# Altium PCB PCB3.PcbDoc
Units mil, origin at the board's own origin, x right, y up, seen from the top; angles counter-clockwise.
Board outline 6000 x 4000 mil, 2 copper layers (Top Layer, Bottom Layer); 68 components, 131 nets, 210 pads, 0 vias.
Unrouted connection lines stored in the file: 108.
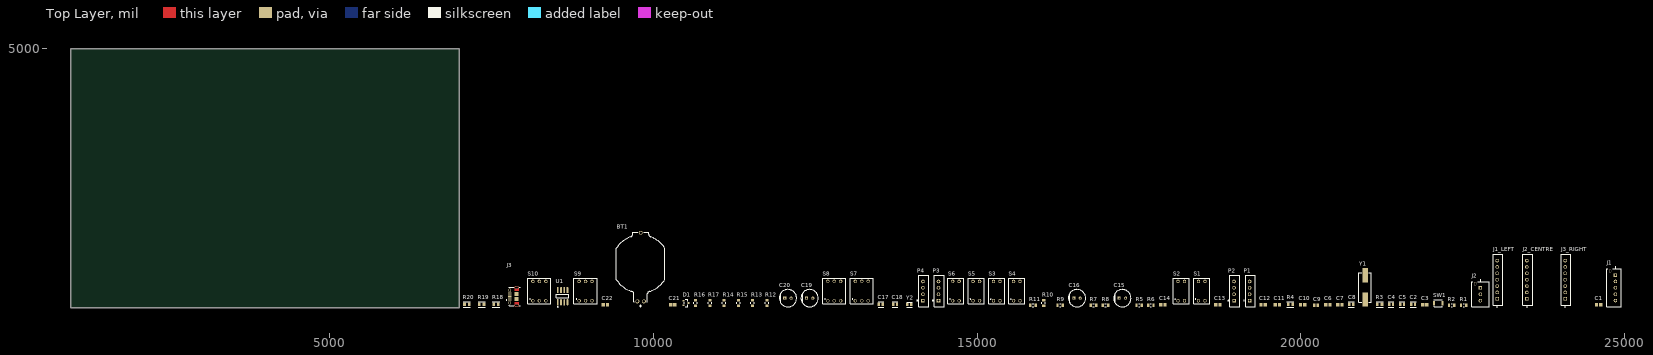
[diagram p0: Top Layer view]
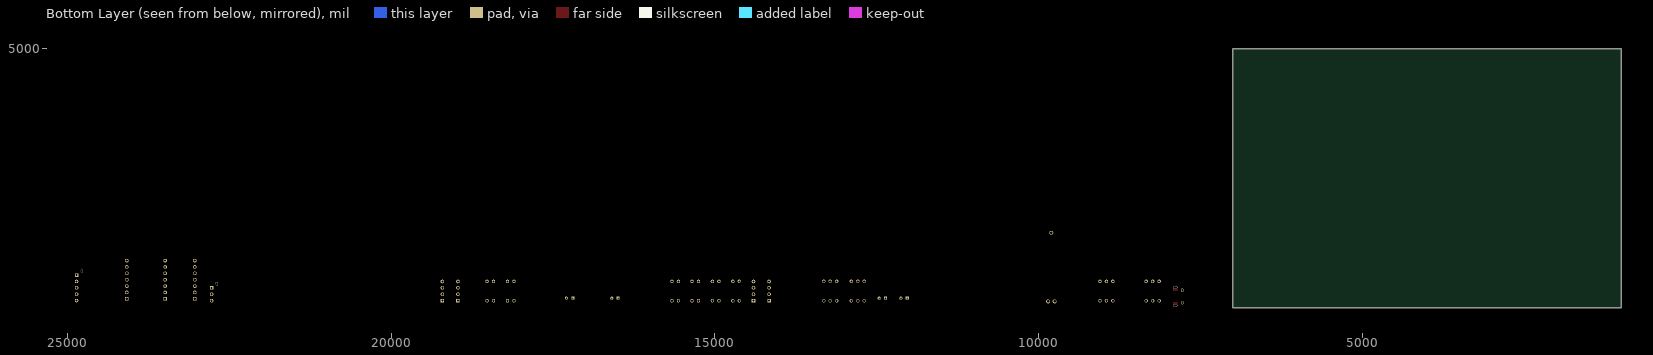
[diagram p1: Bottom Layer view, seen from below]

## Layer stack, top to bottom
Top Solder: solder mask 0.4, Solder Resist, Dk 3.5
Top Layer: signal copper 1.4
Dielectric 1: dielectric 12.6, FR-4, Dk 4.8
Bottom Layer: signal copper 1.4
Bottom Solder: solder mask 0.4, Solder Resist, Dk 3.5

## Board outline
1000,1000 7000,1000 7000,5000 1000,5000

## Design rules (kind name [scope] priority, off if disabled: settings)
Clearance [All] p1: gap=10 ignorepadtopadclearanceinfootprint=FALSE
PolygonConnect [All] p1: connectstyle=Relief reliefconductorwidth=10 reliefentries=4 polygonreliefangle="90 Angle" airgapwidth=10
RoutingVias [All] p1: holewidth=28 width=50 viastyle="Through Hole" minholewidth=28 minwidth=50 maxholewidth=28 maxwidth=50
SolderMaskExpansion [All] p1: expansion=0 istentingtop=FALSE
SupplyNets "Schematic Supply Nets_3" [InNet('VDD')] p1: voltage=0.000
SupplyNets "Schematic Supply Nets_2" [InNet('GND')] p2: voltage=0.000
SupplyNets "Schematic Supply Nets_1" [InNet('+5')] p3: voltage=0.000
SupplyNets "Schematic Supply Nets" [InNet('+12')] p4: voltage=0.000
Width [All] p1: maxlimit=10 minlimit=10 preferedwidth=10
30 further rules are at their usual default settings.

## Components (designator, comment, footprint, x,y, rotation, side; value= is the part's Value field where it differs from the comment)
BT1 "120591-1" TECO-120591-1-2_V 9805,1625 r90 top
C1 "VJ0805Y104MXAAT" CAPC2013X145X48NL20T23 24600,1045 r0 top
C2 "C0805C225K4RACAUTO" FP-C0805C225K4RACAUTO-MFG 21735,1050 r0 top
C3 "VJ0805Y104MXAAT" CAPC2013X145X48NL20T23 21915,1045 r0 top
C4 "C0805C200J5GACAUTO" FP-C0805C-DN-MFG 21395,1050 r0 top value="20 pF"
C5 "C0805C200J5GACAUTO" FP-C0805C-DN-MFG 21565,1050 r0 top value="20 pF"
C6 "VJ0805Y104MXAAT" CAPC2013X145X48NL20T23 20420,1045 r0 top
C7 "VJ0805Y104MXAAT" CAPC2013X145X48NL20T23 20605,1045 r0 top
C8 "C0805C225K4RACAUTO" FP-C0805C225K4RACAUTO-MFG 20780,1050 r0 top
C9 "C0805C106K8RACTU" CAPC2013X145X50LL20T25 20235,1035 r0 top
C10 "VJ0805Y104MXAAT" CAPC2013X145X48NL20T23 20030,1045 r0 top
C11 "VJ0805Y104MXAAT" CAPC2013X145X48NL20T23 19640,1045 r0 top
C12 "VJ0805Y104MXAAT" CAPC2013X145X48NL20T23 19420,1045 r0 top
C13 "VJ0805Y104MXAAT" CAPC2013X145X48NL20T23 18720,1045 r0 top
C14 "VJ0805Y104MXAAT" CAPC2013X145X48NL20T23 17870,1045 r0 top
C15 "EEUFM1E101B" FP-RAD-TH-D_6_3_0_5-L_11-MFG 17245,1145 r0 top
C16 "EEUFM1E101B" FP-RAD-TH-D_6_3_0_5-L_11-MFG 16545,1145 r0 top
C17 "C0805C120JAGACTU" FP-C0805C-DN-MFG 13515,1050 r0 top value="12 pF"
C18 "C0805C120JAGACTU" FP-C0805C-DN-MFG 13735,1050 r0 top value="12 pF"
C19 "EEUFM1E101B" FP-RAD-TH-D_6_3_0_5-L_11-MFG 12415,1145 r0 top
C20 "EEUFM1E101B" FP-RAD-TH-D_6_3_0_5-L_11-MFG 12080,1145 r0 top
C21 "VJ0805Y104MXAAT" CAPC2013X145X48NL20T23 10300,1045 r0 top
C22 "VJ0805Y104MXAAT" CAPC2013X145X48NL20T23 9260,1045 r0 top
D1 "BAT54C,215" FP-SOT23-MFG 10505,1070 r0 top value=10pF
J1 "B5B-XH-AM(LF)(SN)" FP-B5B-XH-AM_LF_SN-MFG 24840,1305 r90 top
J1_LEFT "B7B-EH-A(LF)(SN)" FP-B7B-EH-A_LF_SN-MFG 23045,1430 r90 top
J2 "BH3B-XH-2(LF)(SN)" FP-BH3B-XH-2_LF_SN-MFG 22775,1205 r90 top
J2_CENTRE "B7B-EH-A(LF)(SN)" FP-B7B-EH-A_LF_SN-MFG 23505,1430 r90 top
J3 "10118194-0001LF" AMPHENOL_10118194-0001LF 7890,1170 r90 top
J3_RIGHT "B7B-EH-A(LF)(SN)" FP-B7B-EH-A_LF_SN-MFG 24095,1430 r90 top
P1 "B4B-EH-A(LF)(SN)" JST-B4B-EH-A_V 19210,1255 r90 top
P2 "B4B-EH-A(LF)(SN)" JST-B4B-EH-A_V 18970,1255 r90 top
P3 "B4B-EH-A(LF)(SN)" JST-B4B-EH-A_V 14405,1255 r90 top
P4 "B4B-EH-A(LF)(SN)" JST-B4B-EH-A_V 14165,1255 r90 top
R1 "AT0805DRE0710KL" FP-AT0805-MFG 22515,1035 r0 top
R2 "AT0805DRE0710KL" FP-AT0805-MFG 22330,1035 r0 top
R3 "AF0805JR-070RL" FP-AF0805-IPC_B 21220,1050 r0 top
R4 "AF0805JR-070RL" FP-AF0805-IPC_B 19840,1050 r0 top
R5 "AT0805DRE0710KL" FP-AT0805-MFG 17505,1035 r0 top
R6 "AT0805DRE0710KL" FP-AT0805-MFG 17685,1035 r0 top
R7 "AT0805DRE0710KL" FP-AT0805-MFG 16800,1035 r0 top
R8 "AT0805DRE0710KL" FP-AT0805-MFG 16985,1035 r0 top
R9 "AT0805DRE0710KL" FP-AT0805-MFG 16285,1035 r0 top
R10 "RMCF0805JG4K70" FP-RMCF0805-MFG 16030,1070 r90 top
R11 "RMCF0805JG4K70" FP-RMCF0805-MFG 15865,1035 r0 top
R12 "AT0805DRE0710KL" FP-AT0805-MFG 11755,1070 r90 top
R13 "AT0805DRE0710KL" FP-AT0805-MFG 11535,1070 r90 top
R14 "AT0805DRE0710KL" FP-AT0805-MFG 11095,1070 r90 top
R15 "AT0805DRE0710KL" FP-AT0805-MFG 11315,1070 r90 top
R16 "AT0805DRE0710KL" FP-AT0805-MFG 10655,1070 r90 top
R17 "AT0805DRE0710KL" FP-AT0805-MFG 10875,1070 r90 top
R18 "AF0805JR-070RL" FP-AF0805-IPC_B 7570,1050 r0 top
R19 "AF0805JR-070RL" FP-AF0805-IPC_B 7350,1050 r0 top
R20 "AF0805JR-070RL" FP-AF0805-IPC_B 7120,1050 r0 top
S1 "418117270902" 418117270902 18470,1255 r0 top
S2 "418117270902" 418117270902 18155,1255 r0 top
S3 "418117270902" 418117270902 15305,1255 r0 top
S4 "418117270902" 418117270902 15615,1255 r0 top
S5 "418117270902" 418117270902 14990,1255 r0 top
S6 "418117270902" 418117270902 14675,1255 r0 top
S7 "418117270903" 418117270903 13220,1255 r0 top
S8 "418117270903" 418117270903 12795,1255 r0 top
S9 "418117270903" 418117270903 8955,1255 r0 top
S10 "418117270903" 418117270903 8240,1255 r0 top
SW1 "B3U-1000P" FP-B3U-1000P-MFG 22125,1065 r0 top
U1 "W25Q16JVSNIQ TR" FP-W25Q16JVSNIQ_TR-IPC_A 8600,1175 r90 top
Y1 "ABLS-8.000MHZ-B2-T" FP-ABLS-MFG 20995,1310 r90 top
Y2 "NX2012SA-32.768K-STD-MUB-1" FP-NX2012SA-MFG 13955,1045 r0 top

## Footprints (in the part's own frame and the unit in brackets; to place one, negate y for a bottom-side part, rotate by r counter-clockwise, add the part's x,y. Pads: shape width x height; smd on the part's side, far side on the other; paste and mask are expansions set on the pad)
418117270902 [mm]
  round 1.308 hole 0.8: 1(-1.27,-3.81) 2(1.27,-3.81) A1(-1.27,3.81) A2(1.27,3.81)
  silkscreen extent -3.14,-5.05 3.14,5.05, body extent -3.04,-6.45 3.04,4.1, height 4.95
418117270903 [mm]
  round 1.308 hole 0.8: 1(-2.54,-3.81) 2(0,-3.81) 3(2.54,-3.81) A1(-2.54,3.81) A2(0,3.81) A3(2.54,3.81)
  silkscreen extent -4.56,-5.05 4.56,5.05, body extent -4.46,-6.45 4.46,4.1, height 4.95
AMPHENOL_10118194-0001LF [mm]
  rect 0.4x1.35 smd: 1(-1.3,2.675) 2(-0.65,2.675) 3(0,2.675) 4(0.65,2.675) 5(1.3,2.675)
  oval 0.775x1.55 hole 0.5 slot 1.15 at 90 deg mask+0: SH1(-3.5,0) SH4(3.5,0)
  rect 1.5x1.55 smd: SH2(1,0) SH3(-1,0)
  oval 1.3x0.95 hole 0.55 slot 0.9 at 0 deg: SH5(-2.5,2.7) SH6(2.5,2.7)
  Top Layer region: 3.471,0.774 3.497,0.772 3.523,0.769 3.549,0.764 3.574,0.758 3.6,0.751 3.624,0.742 3.648,0.732 3.672,0.721 3.695,0.708 3.717,0.694 3.739,0.68 3.76,0.664 3.78,0.647 3.799,0.629 3.817,0.61 3.834,0.59 3.85,0.569 3.864,0.547 3.878,0.525 3.891,0.502 3.902,0.478 3.912,0.454 3.921,0.43 3.928,0.404 3.934,0.379 3.939,0.353 3.942,0.327 3.944,0.301 3.945,0.275 3.945,-0.275 3.944,-0.301 3.942,-0.327 3.939,-0.353 3.934,-0.379 3.928,-0.404 3.921,-0.43 3.912,-0.454 3.902,-0.478 3.891,-0.502 3.878,-0.525 3.864,-0.547 3.85,-0.569 3.834,-0.59 3.817,-0.61 3.799,-0.629 3.78,-0.647 3.76,-0.664 3.739,-0.68 3.717,-0.694 3.695,-0.708 3.672,-0.721 3.648,-0.732 3.624,-0.742 3.6,-0.751 3.574,-0.758 3.549,-0.764 3.523,-0.769 3.497,-0.772 3.471,-0.774 3.445,-0.775 2.3,-0.775 2.3,0.775 3.445,0.775
  Top Layer region: -2.3,-0.775 -3.445,-0.775 -3.471,-0.774 -3.497,-0.772 -3.523,-0.769 -3.549,-0.764 -3.574,-0.758 -3.6,-0.751 -3.624,-0.742 -3.648,-0.732 -3.672,-0.721 -3.695,-0.708 -3.717,-0.694 -3.739,-0.68 -3.76,-0.664 -3.78,-0.647 -3.799,-0.629 -3.817,-0.61 -3.834,-0.59 -3.85,-0.569 -3.864,-0.547 -3.878,-0.525 -3.891,-0.502 -3.902,-0.478 -3.912,-0.454 -3.921,-0.43 -3.928,-0.404 -3.934,-0.379 -3.939,-0.353 -3.942,-0.327 -3.944,-0.301 -3.945,-0.275 -3.945,0.275 -3.944,0.301 -3.942,0.327 -3.939,0.353 -3.934,0.379 -3.928,0.404 -3.921,0.43 -3.912,0.454 -3.902,0.478 -3.891,0.502 -3.878,0.525 -3.864,0.547 -3.85,0.569 -3.834,0.59 -3.817,0.61 -3.799,0.629 -3.78,0.647 -3.76,0.664 -3.739,0.68 -3.717,0.694 -3.695,0.708 -3.672,0.721 -3.648,0.732 -3.624,0.742 -3.6,0.751 -3.574,0.758 -3.549,0.764 -3.523,0.769 -3.497,0.772 -3.471,0.774 -3.445,0.775 -2.3,0.775
  silkscreen extent -3.7,-1.45 3.7,4.1, body extent -4.02,-2.68 4.02,2.85, height 2.67
CAPC2013X145X48NL20T23 [mm] "Chip Capacitor, 2-Leads, Body 2.00x1.25mm, IPC Medium Density"
  rect 1.3x1.45 smd: 1(-0.825,0) 2(0.825,0)
  body extent -1.1,-0.72 1.1,0.72, height 1.45
CAPC2013X145X50LL20T25 [mm] "Chip Capacitor, 2-Leads, Body 2.00x1.25mm, IPC High Density"
  rect 1.1x1.35 smd: 1(-0.7,0) 2(0.7,0)
  body extent -1.1,-0.72 1.1,0.72, height 1.45
FP-ABLS-MFG [mm]
  rect 5.6x2.1 smd paste+0 mask+0: 1(-4.75,0) 2(4.75,0)
  silkscreen extent -5.77,-2.42 5.77,2.42, body extent -7.65,-2.52 7.65,2.52, height 0.25
FP-AF0805-IPC_B [mil]
  rect 39.69x53.63 smd paste+0 mask+0: 1(-35.51,0) 2(35.51,0)
  silkscreen extent -55,-43 55,43, body extent -65,-37 65,37, height 10
FP-AT0805-MFG [mm]
  rect 0.9x1.2 smd paste+0 mask+0: 1(-1.05,0) 2(1.05,0)
  silkscreen extent -0.23,-0.67 0.23,0.67, body extent -1.6,-0.77 1.6,0.77, height 0.25
FP-B3U-1000P-MFG [mm]
  rect 0.8x1.7 smd paste+0 mask+0: 1(-1.7,0) 2(1.7,0)
  silkscreen extent -1.6,-1.35 1.6,1.35, body extent -2.2,-1.45 2.2,1.45, height 0.25
FP-B5B-XH-AM_LF_SN-MFG [mm]
  rect 1.4x1.4 hole 0.9 paste-2539.97 mask+0: 1(5,-0.525)
  round 1.4 hole 0.9 paste-2539.97 mask+0: 2(2.5,-0.525) 3(0,-0.525) 4(-2.5,-0.525) 5(-5,-0.525)
  round 1.1 hole 1.1 unplated paste-2539.97 mask+0: ""(6.6,1.475)
  silkscreen extent -7.45,-2.88 8.17,2.88, body extent -7.55,-2.98 7.55,2.98, height 0.25
FP-B7B-EH-A_LF_SN-MFG [mm]
  rect 1.4x1.4 hole 0.9 paste-2539.97 mask+0: 1(-7.5,0.3)
  round 1.4 hole 0.9 paste-2539.97 mask+0: 2(-5,0.3) 3(-2.5,0.3) 4(0,0.3) 5(2.5,0.3) 6(5,0.3) 7(7.5,0.3)
  silkscreen extent -10.72,-1.9 10,1.9, body extent -10.1,-2 10.1,2, height 0.25
FP-BH3B-XH-2_LF_SN-MFG [mm]
  rect 1.4x1.4 hole 0.9 paste-2539.97 mask+0: 1(2.5,0)
  round 1.4 hole 0.9 paste-2539.97 mask+0: 2(0,0) 3(-2.5,0)
  round 1.2 hole 1.2 unplated paste-2539.97 mask+0: ""(4.1,2)
  silkscreen extent -4.95,-3.37 5.62,3.37, body extent -5.05,-3.47 5.05,3.47, height 0.25
FP-C0805C225K4RACAUTO-MFG [mm]
  rect 0.95x1.35 smd paste+0 mask+0: 1(-0.75,0) 2(0.75,0)
  silkscreen extent -1.15,-1.07 1.15,1.07, body extent -1.4,-0.85 1.4,0.85, height 0.25
FP-C0805C-DN-MFG [mm]
  rect 0.95x1.35 smd paste+0 mask+0: 1(-0.75,0) 2(0.75,0)
  silkscreen extent -1.1,-1.07 1.1,1.07, body extent -1.4,-0.85 1.4,0.85, height 0.25
FP-NX2012SA-MFG [mm]
  rect 1x1.25 smd paste+0 mask+0: 1(-0.75,0) 2(0.75,0)
  silkscreen extent -1.05,-1.02 1.05,1.02, body extent -1.35,-0.72 1.35,0.72, height 0.25
FP-RAD-TH-D_6_3_0_5-L_11-MFG [mm]
  rect 1.2x1.2 hole 0.7 paste-2539.97 mask+0: 1(-1.25,0)
  round 1.2 hole 0.7 paste-2539.97 mask+0: 2(1.25,0)
  silkscreen extent -3.4,-3.4 3.4,3.4, body extent -3.5,-3.5 3.5,3.5, height 0.25
FP-RMCF0805-MFG [mm]
  rect 0.9x1.3 smd paste+0 mask+0: 1(-1.05,0) 2(1.05,0)
  silkscreen extent -0.23,-0.67 0.23,0.67, body extent -1.6,-0.77 1.6,0.77, height 0.25
FP-SOT23-MFG [mm]
  rect 0.7x0.6 smd paste-1000 mask+0: 1(-1,0.95) 2(-1,-0.95) 3(1,0)
  silkscreen extent -0.7,-1.5 0.7,1.5, body extent -1.5,-1.65 1.5,1.65, height 0.25
FP-W25Q16JVSNIQ_TR-IPC_A [mil]
  rect 97.4x24.54 smd paste+0 mask+0: 1(-95.12,75)
  rrect100% 97.4x24.54 smd paste+0 mask+0: 2(-95.12,25) 3(-95.12,-25) 4(-95.12,-75) 5(95.12,-75) 6(95.12,-25) 7(95.12,25) 8(95.12,75)
  silkscreen extent -168,-95 27,95, body extent -164,-115 164,115, height 10
JST-B4B-EH-A_V [mm] "Header, 4-Leads, Body 12.5x3.8mm, Pitch 2.5mm"
  rect 1.4x1.4 hole 0.9: 1(-3.75,0)
  round 1.4 hole 0.9: 2(-1.25,0) 3(1.25,0) 4(3.75,0)
  silkscreen extent -6.25,-2.2 6.25,2.37, body extent -6.25,-2.2 6.25,1.6, height 6
TECO-120591-1-2_V [mm] "Lithium Battery Holder"
  round 1.52 hole 1.02: 1(-13.46,-1.27) 1(-13.46,1.27) 2(13.46,0)
  silkscreen extent -15.74,-9.53 13.65,9.53, body extent -13.65,-9.52 13.66,9.52, height 6.41

## Part data
BT1: library part CMP-0438-00001-2, "Lithium Battery Holder for CR2032 3V Cell", Manufacturer="TE Connectivity", AccessRights=2147483647, Body Shape="Horizontal Cylindrical", ComponentLink1Description="Manufacturer URL", ComponentLink1URL=http://www.te.com/, ComponentLink2Description=Datasheet, ComponentLink2URL=http://www.te.com/commerce/DocumentDelivery/DDEController?Action=showdoc&DocId=Customer+Drawing%7F120591%7FH%7Fpdf%7FEnglish%7FENG_CD_120591_H.pdf%7F120591-1, ContentType="Unified Component", ContentTypeGUID=CB3C11C4-E317-11DF-B822-12313F0024A2, DatasheetVersion="Rev. H, 01/2013", Folder="Unified Components\Components\TE Connectivity\Connectors & Connector Components\Power Products\Battery Interconnection Products\", FolderGUID=A6761B51-D489-48A3-9180-F4808F45AB79, ItemGUID=B2C50140-681E-4F62-8DBB-9728605318CE, ItemHRID=CMP-0438-00001, LifeCycle=Released, LifeCycleStateGUID=61E382EE-6656-4F12-9E24-BE9327104A25, Mounting Technology="Through Hole", PackageDescription="Lithium Battery Holder", PackageReference=120591-1, Packing Type=Tray, PartNumber=120591-1, ReleaseDate="20/08/2013 02:50:22 AM", RevisionId=1
C1 C3 C6 C7 C10 C11 C12 C13 C14 C21 C22: library part CMP-2007-01733-1, Manufacturer=Vitramon, Part Number=VJ0805Y104MXAAT
C2 C8: library part CMP-2007-03267-2, "CAP CER 2.2UF 16V X7R 0805", Capacitance=2.2uF, Case Code (Imperial)=0805, Case Code (Metric)=2012, Dielectric=X7R, Dielectric Material=Ceramic, Max Operating Temperature=125°C, Min Operating Temperature=-55°C, Package Quantity=1, Ratings=AEC-Q200, Tolerance=10%, Voltage Rating=16V, Case/Package=0805, Construction=Flat, Contact Plating=Tin, Depth=1.25mm, Height=1.25mm, Length=0.079inch, Mount="Surface Mount", Packaging="Cut Tape", Radiation Hardening=No, REACH SVHC="No SVHC", RoHS Compliant=Yes, Series=C, Thickness=0.055inch, Voltage Rating (DC)=16V, Width=0.049inch
C4 C5: library part CMP-03020-000773-1, "C0805 20 pF C0G 30ppm/°C 5.00% 50 V", Capacitance="20 pF", Manufacturer=KEMET, Package=C0805C-DN, Temperature="-55°C to +125°C", Temperature Characteristic=C0G, Temperature Coefficient=30ppm/°C, Temperature Range High=+125°C, Temperature Range Low=-55°C, Tolerance=0.05, Voltage Rating="50 V", Automotive=No, Category=Cap, ComponentLink2Description=Datasheet, ComponentLink2URL=https://content.kemet.com/datasheets/KEM_C1003_C0G_SMD.pdf, Device Class L1="Passive Components", Device Class L2=Capacitors, Device Class L3="Ceramic Capacitors", Height=0.88mm, Ipc Land Pattern Name=CAPC200125X78, Lead Free=Yes, Manufacturer Part Number=C0805C200J5GACAUTO, Material=Ceramic, Octopart=https://octopart.com/c0805c200j5gacauto-kemet-88373638, RoHS=TRUE
C9: library part CMP-2007-01044-1, Manufacturer=Kemet, Part Number=C0805C106K8RACTU
C15 C16 C19 C20: library part CMP-05427-000856-1, "Aluminum Electrolytic Capacitors (Radial Lead Type) 100uF ±20% 25V", Capacitance=100uF, Case/Package=Radial, ESR (Equivalent Series Resistance)=130mR, Max Operating Temperature=105°C, Min Operating Temperature=-40°C, Package Quantity=2000, Ripple Current=455mA, Tolerance=20%, Voltage Rating=25V, Diameter=6mm, Height - Seated (Max)=0.5inch, Impedance=130mR, Lead Diameter=0.5mm, Lead Pitch=5mm, Length=11mm, Life (Hours)=2000Hour, Mount="Through Hole", Packaging="Tape and Reel", Polarity=Polar, RoHS Compliant=Yes, Series=FM, Termination=Radial, Voltage Rating (DC)=25V
C17 C18: library part CMP-03020-011084-1, "C0805 12 pF C0G 30ppm/°C 5.00% 250 V", Capacitance="12 pF", Manufacturer=KEMET, Package=C0805C-DN, Temperature="-55°C to +125°C", Temperature Characteristic=C0G, Temperature Coefficient=30ppm/°C, Temperature Range High=+125°C, Temperature Range Low=-55°C, Tolerance=0.05, Voltage Rating="250 V", Automotive=No, Category=Cap, ComponentLink2Description=Datasheet, ComponentLink2URL=https://content.kemet.com/datasheets/KEM_C1003_C0G_SMD.pdf, Device Class L1="Passive Components", Device Class L2=Capacitors, Device Class L3="Ceramic Capacitors", Height=0.88mm, Ipc Land Pattern Name=CAPC200125X78, Lead Free=Yes, Manufacturer Part Number=C0805C120JAGACTU, Material=Ceramic, Octopart=https://octopart.com/c0805c120jagactu-kemet-88373179, RoHS=TRUE
D1: library part CMP-14398-000007-1, "DIODE ARRAY SCHOTTKY 30V SOT23", Ambient Temperature Range High=+150°C, Ambient Temperature Range Low=-55°C, Capacitance=10pF, Forward Current=200mA, Manufacturer=Nexperia, Max Surge Forward Current=600mA, Package=SOT23, Peak Reverse Current=2uA, Reverse Voltage=30V, Temperature="to +150°C", Automotive=Yes, Automotive Grade="Grade 0", Category=Diode, ComponentLink2Description=Datasheet, ComponentLink2URL=https://assets.nexperia.com/documents/data-sheet/BAT54_SER.pdf, Device Class L1="Discrete Semiconductors", Device Class L2=Diodes, Device Class L3="Schottky Diodes", Digikey Description="DIODE ARRAY SCHOTTKY 30V SOT23", Footprint Url=https://assets.nexperia.com/documents/outline-drawing/SOT23.pdf, Height=1.1mm, Ipc Land Pattern Name=SOT95P230X100-3, Lead Free=Yes, Manufacturer Part Number=BAT54C,215, Max Junction Temp=+150°C, Mouser Description="Schottky Diodes, Rectifiers - Arrays SOT-23 (TO-236AB) 30V 200mA (DC) Surface Mount", Octopart=https://octopart.com/bat54c%2C215-nexperia-78738945, RoHS=TRUE, Temperature Range High=+150°C
J1: library part CMP-17439-000304-1, "CONN HEADER VERT 5POS 2.5MM", Color=Green, Contact Resistance=20mR, Flammability Rating="UL94 V-0", Housing Color=White, Insulation Color=Natural, Max Current Rating=3A, Max Operating Temperature=85°C, Max Voltage Rating (AC)=250V, Min Operating Temperature=-25°C, Connector Type=Header, Contact Finish - Mating=TIN, Contact Material=Brass, Contact Plating=Copper, Contact Shape=Square, Contact Type="Male Pin", Depth=5.75mm, Fastening Type=Detent, Housing Material=Polyamide, Insulation Material=Nylon, Lead Free="Lead Free", Length=14.9mm, Mated Stacking Heights=9.8mm, Mount="Through Hole", Number of Positions=5, Number of Rows=1, Orientation=Straight, Packaging=Bulk, Pitch=2.5mm, Series=XH, Termination=Solder, Voltage Rating=250V
J1_LEFT J2_CENTRE J3_RIGHT: library part CMP-17439-000532-1, "CONN HEADER VERT 7POS 2.5MM", Color=Natural, Current Rating=3A, Flammability Rating="UL94 V-0", Housing Color=White, Voltage Rating=250V, Connector Type=Header, Contact Finish - Mating=TIN, Contact Material=Brass, Contact Mating Length=0.13inch, Contact Plating=Tin, Contact Shape=Square, Contact Type="Male Pin", Fastening Type=Friction, Gender=Male, Housing Material=Nylon, Insulation Color=Natural, Insulation Material=Nylon, Lead Free="Lead Free", Mated Stacking Heights=8.1mm, Mount="Through Hole", Number of Contacts=7, Number of Positions=7, Number of Rows=1, Orientation=Straight, Packaging=Bulk, Pitch=2.5mm, Series=EH, Termination=Solder
J2: library part CMP-17439-000649-1, "CONN HEADER VERT 3POS 2.5MM", Flammability Rating="UL94 V-0", Insulation Color=Natural, Max Operating Temperature=85°C, Min Operating Temperature=-25°C, Voltage Rating=250V, Connector Type=Header, Contact Finish - Mating=TIN, Contact Material=Brass, Contact Shape=Square, Contact Type="Male Pin", Fastening Type=Detent, Height=14.2mm, Insulation Material=Nylon, Lead Free="Lead Free", Length=9.9mm, Mated Stacking Heights=9.8mm, Mount="Through Hole", Number of Poles=3, Number of Positions=3, Number of Rows=1, Packaging=Bulk, Pitch=2.5mm, Series=XH, Termination=Press-Fit, Width=5.75mm
J3: "Micro USB, Input Output Connectors, B TYPE RECEPTACLE with flange", Package=None, Check_prices=https://www.snapeda.com/parts/10118194-0001LF/Amphenol+FCI/view-part/?ref=eda, MF="Amphenol ICC", MP=10118194-0001LF, SnapEDA_Link=https://www.snapeda.com/parts/10118194-0001LF/Amphenol+FCI/view-part/?ref=snap
P1 P2 P3 P4: library part CMP-2000-05904-1, "Male Header, Pitch 2.5 mm, 1 x 4 Position, Height 6 mm, Tail Length 3.2 mm, -25 to 85 degC, RoHS, Bulk", Manufacturer=JST, Package Description="Male Header, Pitch 2.5 mm, 1 x 4 Position, Height 6 mm, Tail Length 3.2 mm", Package Reference=B4B-EH-A, Datasheet URL=http://www.jst-mfg.com/product/pdf/eng/eEH.pdf, Datasheet Version=12/2012, Manufacturer URL=http://www.jst.com/home2.html, Mounting Technology=SurfaceMount, No of Positions=4, Pitch=2.5mm, Style/Orientation=StraightHeader/Plug, Termination=Crimp, Type=ShroudedHeader
R1 R2 R5 R6 R7 R8 R9 R12 R13 R14 R15 R16 R17: library part CMP-03412-049031-1, "Thin Film Chip Resistors Automotive Grade 10kΩ 0.5% 50ppm/°C 0805", Case/Package=0805, Max Operating Temperature=155°C, Max Power Dissipation=125mW, Min Operating Temperature=-55°C, Ratings=AEC-Q200, Resistance=10kR, Resistor Type="Thin Film", Temperature Coefficient=50ppm/°C, Tolerance=0.5%, Features="Moisture Resistant", Height=0.024inch, Length=0.079inch, Number of Terminations=2, Packaging="Tape and Reel", RoHS Compliant=Yes, Series=AT, Width=0.049inch
R3 R4 R18 R19 R20: library part CMP-03412-047152-1, "Anti-Sulfurated Chip Resistor Automotive Grade 0Ω Jumper 0.125W 0805", Case Code (Imperial)=0805, Case Code (Metric)=2012, Max Operating Temperature=155°C, Max Power Dissipation=125mW, Min Operating Temperature=-55°C, Package Quantity=5000, Resistance=0R, Resistor Type="Thick Film", Case/Package=0805, Features="Moisture Resistant", Height=0.024inch, Length=0.079inch, Number of Terminations=2, Packaging="Tape and Reel", RoHS Compliant=Yes, Series=AF, Termination=SMD/SMT, Weight=0.000194oz, Width=1.25mm
R10 R11: library part CMP-26527-004085-1, "4.7kΩ ±5% 0.125W 0805 Thick Film Chip Resistor AEC-Q200 compliant", Case Code (Imperial)=0805, Case Code (Metric)=2012, Max Operating Temperature=155°C, Max Power Dissipation=125mW, Min Operating Temperature=-55°C, Package Quantity=10000, Resistance=4.7kR, Resistor Type="Thick Film", Temperature Coefficient=200ppm/°C, Tolerance=5%, Case/Package=0805, Contact Plating=Tin, Features="Automotive AEC-Q200", Height=0.026inch, Length=0.079inch, Mount="Surface Mount", Number of Terminations=2, Packaging="Tape and Reel", Radiation Hardening=No, RoHS Compliant=Yes, Series=RMCF, Width=0.049inch
S1 S2 S3 S4 S5 S6: "Dip Switch SPST 2 Position Through Hole Slide (Standard) Actuator 25mA 24VDC", Package=None, Check_prices=https://www.snapeda.com/parts/418117270902/W%25C3%25BCrth+Elektronik+Midcom/view-part/?ref=eda, MF="WÃ¼rth Elektronik", MP=418117270902, SnapEDA_Link=https://www.snapeda.com/parts/418117270902/W%25C3%25BCrth+Elektronik+Midcom/view-part/?ref=snap
S7 S8 S9 S10: "Dip Switch SPST 3 Position Through Hole Slide (Standard) Actuator 25mA 24VDC", Package=None, Check_prices=https://www.snapeda.com/parts/418117270903/W%25C3%25BCrth+Elektronik+Midcom/view-part/?ref=eda, MF="WÃ¼rth Elektronik", MP=418117270903, SnapEDA_Link=https://www.snapeda.com/parts/418117270903/W%25C3%25BCrth+Elektronik+Midcom/view-part/?ref=snap
SW1: library part CMP-2100-03586-2, "SWITCH TACTILE SPST-NO 0.05A 12V", Contact Current Rating=50mA, Contact Resistance=100mR, Insulation Resistance=100MR, Max Operating Temperature=70°C, Max Voltage Rating (DC)=12V, Min Operating Temperature=-25°C, Operating Force=1.5N, Package Quantity=1, Ratings="Dust Proof", Actuator Length=0.4mm, Actuator Type=Standard, Contact Material=Silver, Current Rating=50mA, Depth=2.5mm, Electrical Life=200000Cycles, Height=1.2mm, Illumination Type=Non-Illuminated, Lead Free="Lead Free", Length=4mm, Max Current Rating=50mA, Mechanical Life=200000Cycles, Mount="Surface Mount", Orientation=Straight, Packaging="Tape and Reel", Switch Function=Off-Mom, Switch Travel=0.15mm, Termination=SMD/SMT, Throw Configuration=SPST, Voltage Rating (DC)=12V, Weight=0.000776oz, Width=3mm
U1: library part CMP-78876-000009-2, "IC FLASH 16MBIT SPI/QUAD 8SOIC", Ambient Temperature Range High=85°C, Max Supply Voltage=3.6V, Min Operating Temperature=-40°C, Min Supply Voltage=2.7V, Access Time=5ms, Height=1.75mm, Interface=SPI, Max Operating Temperature=85°C, Memory Size=2MB, Memory Type=FLASH, NexarPartId=75645707, RoHS=Non-Compliant, Schedule B="8542320070, 8542320070"
Y1: library part CMP-27762-009874-1, "CRYSTAL 8.0000MHZ 18PF SMD", Case/Package=SMD/SMT, ESR (Equivalent Series Resistance)=80R, Frequency=8MHz, Frequency Stability=50ppm, Frequency Tolerance=20ppm, Load Capacitance=18pF, Max Operating Temperature=70°C, Min Operating Temperature=-20°C, Operating Frequency="8 MHz", Package Quantity=1000, Accuracy=20ppm, Contact Plating=Tin, Depth=4.7mm, Height=0.165inch, Lead Free="Lead Free", Length=11.4mm, Mount="Surface Mount", Number of Pins=2, Packaging="Tape and Reel", Radiation Hardening=No, REACH SVHC="No SVHC", Series=ABLS, Series Resistance=80R, Termination=SMD/SMT, Tolerance=20ppm, Width=4.7mm
Y2: library part CMP-200220-000019-1, "CRYSTAL 32.7680KHZ 12.5PF SMD", Case/Package=SMD/SMT, ESR (Equivalent Series Resistance)=80kR, Frequency=32.768kHz, Frequency Tolerance=20ppm, Load Capacitance=12.5pF, Max Operating Temperature=85°C, Min Operating Temperature=-40°C, Height=0.024inch, Length=0.081inch, Mount="Surface Mount", Packaging="Cut Tape", RoHS Compliant=Yes, Series=NX2012SA, Width=0.047inch

## Nets (pads, with @x,y where several pads share a name; then routed paths per layer and width w, separated by ;. In a path a pad name is that pad's centre, name@x,y a point inside that pad or via, vN(x,y) a via of type N, cw(c..) or ccw(c..) an arc to the next point about the centre after c; other vN are vias at no path point)
+5: J2.3
+12: C15.2 C16.2 C19.2 C20.2
GND: BT1.2 C1.1 C2.1 C3.1 C4.1 C5.1 C6.1 C7.1 C8.1 C9.1 C10.1 C11.1 C12.1 C13.1 C14.1 C17.1 C18.2 C21.1 C22.2 J1.3 J2.2 J3.5 R2.1 R5.1 R6.1 R7.1 R8.1 R9.1 R12.1 R13.1 R14.1 R15.1 R16.1 R17.1 R18.2 SW1.2 U1.4
NetBT1_1: BT1.1 D1.2
NetC2_2: C2.2
NetC3_2: C3.2 R1.2 SW1.1
NetC4_2: C4.2 Y1.1
NetC5_2: C5.2 Y1.2
NetC8_2: C8.2
NetC15_1: C15.1
NetC16_1: C16.1
NetC19_1: C19.1
NetC20_1: C20.1
NetJ3_2: J3.2 R20.1
NetJ3_3: J3.3 R19.1
NetJ3_SH1: J3.SH1 J3.SH2 J3.SH3 J3.SH4 J3.SH5 J3.SH6 R18.1
NetP1_1: P1.1
NetP1_2: P1.2
NetP1_3: P1.3
NetP1_4: P1.4
NetP2_1: P2.1
NetP2_2: P2.2
NetP2_3: P2.3
NetP2_4: P2.4
NetP3_1: P3.1
NetP3_2: P3.2
NetP3_3: P3.3
NetP3_4: P3.4
NetP4_1: P4.1
NetP4_2: P4.2
NetP4_3: P4.3
NetP4_4: P4.4
NetR2_2: R2.2
NetR5_2: R5.2 S1.2
NetR6_2: R6.2 S1.1
NetR7_2: R7.2 S2.2
NetR8_2: R8.2 S2.1
NetR12_2: R12.2 S7.1
NetR13_2: R13.2 S8.1
NetR14_2: R14.2 S7.2
NetR15_2: R15.2 S7.3
NetR16_2: R16.2 S8.2
NetR17_2: R17.2 S8.3
NetS3_1: S3.1
NetS4_1: S4.1
NetS5_1: S5.1
NetS6_1: S6.1
PA0: 
PA1: J1_LEFT.6
PA2: J2_CENTRE.6
PA3: J3_RIGHT.6
PA4: J1_LEFT.1
PA5: 
PA6: J2_CENTRE.1
PA7: J3_RIGHT.1
PA8: J3_RIGHT.4
PA9: 
PA10: 
PA11: R20.2
PA12: R19.2
PA13: J1.4
PA14: J1.5
PA15: U1.1
PB0: 
PB1: 
PB2: R9.2
PB3: U1.6
PB4: U1.2
PB5: U1.5
PB6: J1_LEFT.2 J2_CENTRE.2 J3_RIGHT.2 R11.2
PB7: J1_LEFT.3 J2_CENTRE.3 J3_RIGHT.3 R10.2
PB8: 
PB9: 
PB10: 
PB11: 
PB12: 
PB13: 
PB14: 
PB15: 
PC0: J1_LEFT.5
PC1: J2_CENTRE.5
PC2: J3_RIGHT.5
PC3: J1_LEFT.7 J2_CENTRE.7 J3_RIGHT.7
PC4: 
PC5: 
PC6: 
PC7: 
PC8: 
PC9: 
PC10: 
PC11: 
PC12: 
PC13: 
PC14: C17.2 Y2.1
PC15: C18.1 Y2.2
PD0: 
PD1: 
PD2: 
PD3: 
PD4: 
PD5: 
PD6: 
PD7: 
PD8: 
PD9: 
PD10: 
PD11: 
PD12: 
PD13: 
PD14: 
PD15: 
PE0: J1_LEFT.4
PE1: J2_CENTRE.4
PE2: 
PE3: 
PE4: 
PE5: 
PE6: 
PE7: 
PE8: 
PE9: 
PE10: 
PE11: 
PE12: 
PE13: 
PE14: 
PE15: 
VBAT: C21.2 D1.3
VDD: C1.2 C6.2 C9.2 C10.2 C11.2 C12.2 C13.2 C14.2 C22.1 D1.1 J1.2 J2.1 R1.1 R3.1 R10.1 R11.1 S1.A1 S1.A2 S2.A1 S2.A2 S3.A1 S4.A1 S5.A1 S6.A1 S7.A1 S7.A2 S7.A3 S8.A1 S8.A2 S8.A3 U1.3 U1.7 U1.8
VDDA: C7.2 R3.2 R4.2
VREF+: R4.1
pads on no net: J1. J1.1 J2. J3.1 J3.4 S3.2 S3.A2 S4.2 S4.A2 S5.2 S5.A2 S6.2 S6.A2 S9.1 S9.2 S9.3 S9.A1 S9.A2 S9.A3 S10.1 S10.2 S10.3 S10.A1 S10.A2 S10.A3

## Text inside footprints (layer, text, board x,y; h text height)
J3: Mechanical 13 "PCB EDGE" at 7939.21,1337.32 h32 r90